# Altium PCB pcb.PcbDoc
Units mm, origin at the board's own origin, x right, y up, seen from the top; angles counter-clockwise.
Board outline 22.86 x 22.86 mm, 2 copper layers (Top Layer, Bottom Layer); 3 components, 11 nets, 22 pads, 0 vias.
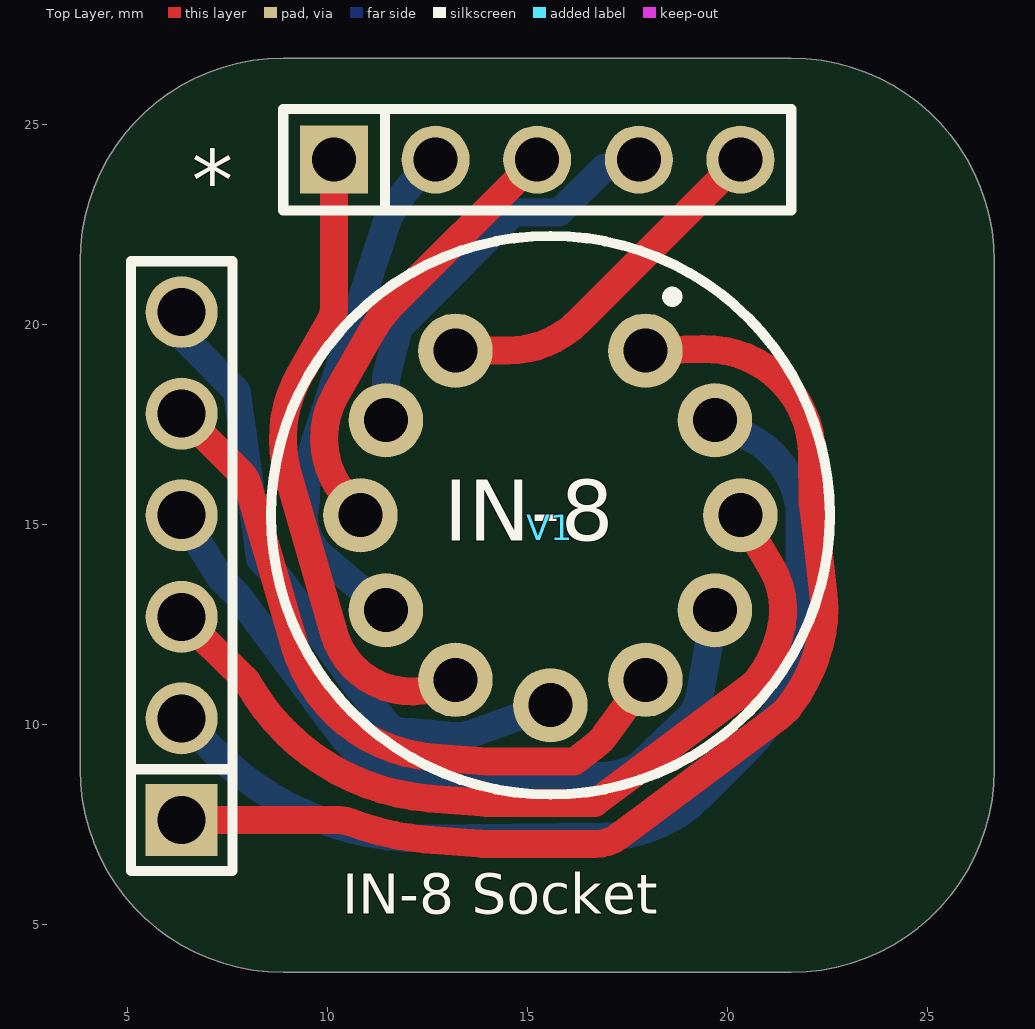
[diagram p0: Top Layer view]
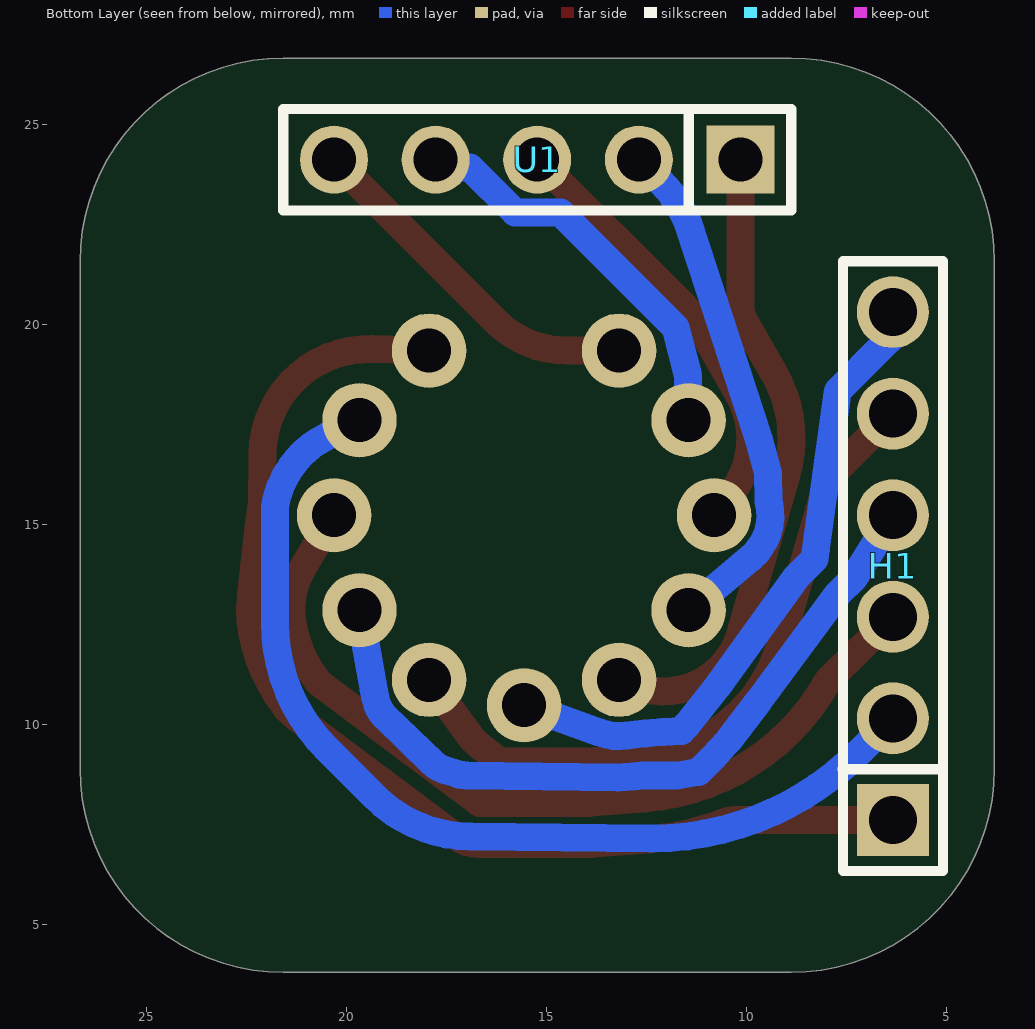
[diagram p1: Bottom Layer view, seen from below]

## Layer stack, top to bottom
Top Solder: solder mask 0.0102, Solder Resist, Dk 3.5
Top Layer: signal copper 0.0356
Dielectric 1: dielectric 0.32, FR-4, Dk 4.8
Bottom Layer: signal copper 0.0356
Bottom Solder: solder mask 0.0102, Solder Resist, Dk 3.5

## Board outline
3.81,8.89 3.81,21.59 cw(c8.89,21.59) 8.89,26.67 21.59,26.67 cw(c21.59,21.59) 26.67,21.59 26.67,8.89 cw(c21.59,8.89) 21.59,3.81 8.89,3.81 cw(c8.89,8.89)

## Design rules (kind name [scope] priority, off if disabled: settings)
BoardOutlineClearance [All] p1: gap=0.2 ignorepadtopadclearanceinfootprint=FALSE
Clearance [All] p1: gap=0.127 ignorepadtopadclearanceinfootprint=FALSE except(0.25: Arc-Hole Track-Hole SMDPad-Hole THPad-Hole Via-Hole Fill-Hole Poly-Hole Region-Hole Text-Hole; 0.33: Arc-Arc Arc-Track Track-Track)
ComponentClearance [All] p1: gap=0.127 collisioncheckmode=3 verticalgap=0.127 showdistances=TRUE
DiffPairsRouting [All] p1: maxlimit=0.254 minlimit=0.127 mostfreqgap=0.127 toplayer_minwidth=0.127 toplayer_maxwidth=25.4 toplayer_prefwidth=0.127 bottomlayer_minwidth=0.127 bottomlayer_maxwidth=25.4 bottomlayer_prefwidth=0.127 maxuncoupledlength=12.7
Height [All] p1: minheight=0 maxheight=1816.048 prefheight=12.7
HoleSize [All] p1: absolutevalues=TRUE maxlimit=6.3 minlimit=0.3 maxpercent=80.000 minpercent=20.000
HoleToHoleClearance [All] p1: gap=0.25 allowstackedmicrovias=FALSE
MinimumAnnularRing [All] p1: minimumring=0.076
MinimumSolderMaskSliver [All] p1: minsoldermaskwidth=0
PlaneClearance [All] p1: clearance=0.127
PlaneConnect PlaneConnectPowerPads [InPadClass('PowerPads')] p1: planeconnectstyle=Direct reliefexpansion=0.508 reliefentries=4 reliefconductorwidth=0.254 reliefairgap=0.254
PlaneConnect [All] p2: pad.planeconnectstyle=Relief pad.reliefexpansion=0.3 pad.reliefentries=4 pad.reliefconductorwidth=0.127 pad.reliefairgap=0.127 via.planeconnectstyle=Direct via.reliefexpansion=0.3 via.reliefentries=4 via.reliefconductorwidth=0.127 via.reliefairgap=0.127
PolygonConnect PolygonConnectPowerPads [All vs (InPadClass('PowerPads'))] p1: connectstyle=Direct reliefconductorwidth=0.254 reliefentries=4 polygonreliefangle="90 Angle" airgapwidth=0.254
PolygonConnect [All] p2: thpad.connectstyle=Relief thpad.reliefconductorwidth=0.127 thpad.reliefentries=4 thpad.polygonreliefangle="90 Angle" thpad.airgapwidth=0.127 smdpad.connectstyle=Relief smdpad.reliefconductorwidth=0.127 smdpad.reliefentries=4 smdpad.polygonreliefangle="90 Angle" smdpad.airgapwidth=0.127 via.connectstyle=Direct via.reliefconductorwidth=0.127 via.reliefentries=4 via.polygonreliefangle="90 Angle" via.airgapwidth=0.127
RoutingVias [All] p1: holewidth=0.3 width=0.6 viastyle="Through Hole" minholewidth=0.3 minwidth=0.6 maxholewidth=0.6 maxwidth=6.6
SilkToSilkClearance [All] p1: silktosilkclearance=0
SilkToSolderMaskClearance [IsPad] p1: minsilkscreentomaskgap=0.127 clearancetoexposedcopper=TRUE
SolderMaskExpansion [All] p1: expansion=0.075 istentingtop=FALSE
Width [All] p1: maxlimit=25.4 minlimit=0.127 preferedwidth=0.7 minimp=50.000000 maximp=50.000000 favimp=50.000000
20 further rules are at their usual default settings.

## Components (designator, comment, footprint, x,y, rotation, side; value= is the part's Value field where it differs from the comment)
H1 "2.54-1x6P" 2.54-1x6P 6.35,13.97 r90 bottom
U1 "HX PZ2.54-1x5P ZZ" "HX PZ2.54-1x5P ZZ" 15.24,24.13 r0 bottom
V1 "Nixie_Tube_IN-8" Nixie_Tube_IN-8 15.57,15.24 r0 top

## Footprints (in the part's own frame and the unit in brackets; to place one, negate y for a bottom-side part, rotate by r counter-clockwise, add the part's x,y. Pads: shape width x height; smd on the part's side, far side on the other; paste and mask are expansions set on the pad)
2.54-1x6P [mm] "Pin Headers. -40C~+105C 1 1x6P 2.54mm 2.5mm 3A 3mm 6P 6mm Black Brass Gold Pin Header Through Hole ,P=2.54mm Pin Headers ROHS"
  rect 1.8x1.8 hole 1.2: 1(-6.35,0)
  round 1.8 hole 1.2: 2(-3.81,0) 3(-1.27,0) 4(1.27,0) 5(3.81,0) 6(6.35,0)
  silkscreen extent -7.62,-1.25 7.62,1.25, body extent -7.63,-1.27 7.62,1.27, height 8.5
"HX PZ2.54-1x5P ZZ" [mm] "Pin Headers. -40C~+105C 1 1kV 1x5P 2.54mm 2.5mm 3A 3mm 5P 6mm Black Brass Gold Pin Header Through Hole Plugin,P=2.54mm Pin Headers ROHS"
  rect 1.7x1.7 hole 1.1: 1(-5.08,0)
  round 1.7 hole 1.1: 2(-2.54,0) 3(0,0) 4(2.54,0) 5(5.08,0)
  silkscreen extent -6.35,-1.27 6.35,1.27, body extent -6.35,-1.27 6.36,1.27, height 8.54
Nixie_Tube_IN-8 [mm]
  round 1.862 hole 1.1: 1(2.375,4.114) 2(4.114,2.375) 3(4.75,0) 4(4.114,-2.375) 5(2.375,-4.114) 6(0,-4.75) 7(-2.375,-4.114) 8(-4.114,-2.375) 9(-4.75,0) 10(-4.114,2.375) 11(-2.375,4.114)
  silkscreen extent -6.98,-6.98 6.98,6.98

## Part data
H1: "Pin Headers. -40C~+105C 1 1x6P 2.54mm 2.5mm 3A 3mm 6P 6mm Black Brass Gold Pin Header Through Hole ,P=2.54mm Pin Headers ROHS", JLCPCB Part #=C37208, Manufacturer="BOOMELE(Boom Precision Elec)", Component Type=Standard, Design Item ID=2.54-1x6P, Manufacturer Part Number=2.54-1x6P
U1: "Pin Headers. -40C~+105C 1 1kV 1x5P 2.54mm 2.5mm 3A 3mm 5P 6mm Black Brass Gold Pin Header Through Hole Plugin,P=2.54mm Pin Headers ROHS", JLCPCB Part #=C32713271, Manufacturer=hanxia, Component Type="Integrated Circuits", Design Item ID="HX PZ2.54-1x5P ZZ", Manufacturer Part Number="HX PZ2.54-1x5P ZZ"

## Nets (pads, with @x,y where several pads share a name; then routed paths per layer and width w, separated by ;. In a path a pad name is that pad's centre, name@x,y a point inside that pad or via, vN(x,y) a via of type N, cw(c..) or ccw(c..) an arc to the next point about the centre after c; other vN are vias at no path point)
AN_COMMON: U1.5 V1.11 | length 9
  Top Layer w0.7: V1.11 14.492,19.354 ccw(c14.492,21.894) 16.288,20.098 U1.5
CATH_0: U1.4 V1.10 | length 10.1
  Bottom Layer w0.7: V1.10@11.465,17.648 11.465,18.709 11.787,19.937 12.198,20.348 cw(c13.195,19.354) 12.2,20.35 14.653,22.803 15.79,22.803 16.925,23.939 17.589,23.939 U1.4
CATH_1: H1.1 V1.1 | length 28.6
  Top Layer w0.7: H1.1 10.292,7.62 cw(c10.29,6.92) 10.542,7.573 ccw(c12.986,13.865) 12.451,7.136 13.791,7.029 ccw(c13.958,9.082) 13.958,7.022 16.685,7.022 ccw(c16.685,8.052) 17.302,7.227 21.244,10.177 ccw(c20.629,11.003) 21.246,10.178 21.286,10.208 ccw(c20.669,11.033) 21.398,10.305 21.467,10.374 ccw(c20.741,11.105) 21.561,10.482 ccw(c18.102,13.097) 22.366,12.305 ccw(c19.306,12.873) 22.398,13.223 22.21,14.914 22.126,15.54 22.112,16.759 ccw(c19.445,16.727) 19.369,19.394 V1.1
CATH_2: H1.2 V1.2 | length 25.4
  Bottom Layer w0.7: H1.2 7.213,9.297 ccw(c12.379,14.47) 12.374,7.16 12.379,7.16 16.906,7.21 16.924,7.21 ccw(c16.91,10.59) 19.3,8.2 20.491,9.391 ccw(c17.329,12.552) 21.8,12.552 21.8,15.384 ccw(c21.1,15.384) 21.788,15.513 ccw(c19.436,15.067) 20.496,17.214 V1.2
CATH_3: H1.3 V1.3 | length 21.7
  Top Layer w0.7: H1.3 7.917,11.154 cw(c7.426,10.656) 7.921,11.151 7.988,11.084 ccw(c12.986,13.865) 12.529,8.163 13.874,8.055 ccw(c13.958,9.082) 13.958,8.052 16.685,8.052 20.629,11.003 20.669,11.033 20.741,11.105 ccw(c18.102,13.097) 21.352,12.491 21.353,12.495 ccw(c19.306,12.873) 21.095,13.937 V1.3 V1.3@20.323,15.236
CATH_4: H1.4 V1.4 | length 19.2
  Bottom Layer w0.7: H1.4 7.322,13.675 7.727,13.27 9.693,10.613 10.454,9.614 10.714,9.328 10.893,9.135 10.908,9.12 11.205,8.824 11.76,8.73 12.61,8.73 cw(c12.607,7) 12.849,8.713 ccw(c13.195,11.126) 13.225,8.689 17.008,8.732 ccw(c17,9.432) 17.206,8.763 17.555,8.87 ccw(c16.797,11.33) 17.57,8.875 ccw(c17.36,9.543) 17.848,9.04 19.054,10.211 ccw(c18.566,10.713) 19.227,10.482 ccw(c16.797,11.33) 19.331,10.881 V1.4
CATH_5: H1.5 V1.5 | length 17.6
  Top Layer w0.7: H1.5 7.834,16.296 cw(c7.338,15.802) 8.01,15.997 9.169,11.999 ccw(c12.924,13.087) 12.63,9.189 13.668,9.11 13.8,9.1 13.958,9.082 16.153,9.082 ; 16.154,9.083 16.689,9.483 ccw(c16.025,10.371) 16.922,9.719 V1.5
CATH_6: H1.6 V1.6 | length 16.3
  Bottom Layer w0.7: H1.6 ccw(c11.5,20.32) 6.389,19.689 6.566,19.511 7.727,18.35 8.275,14.38 8.307,14.147 8.757,13.697 10.723,10.972 11.484,10.015 11.637,9.848 cw(c11.275,-2.415) 12.994,9.733 ccw(c13.195,11.126) 13.675,9.803 V1.6
CATH_7: U1.1 V1.7 | length 16.1
  Top Layer w0.7: U1.1 10.16,20.441 cw(c9.46,20.441) 10.068,20.094 9.312,18.776 ccw(c12.124,17.162) 9.009,16.261 10.157,12.288 ccw(c12.086,12.844) 12.832,10.981 V1.7
CATH_8: U1.2 V1.8 | length 12.9
  Bottom Layer w0.7: V1.8 9.914,14.162 cw(c10.82,15.24) 9.445,15.543 cw(c10.82,15.24) 9.46,15.604 9.472,16.285 9.699,17.13 9.705,17.148 11.484,22.586 11.59,22.792 cw(c14.56,21.27) 12.2,23.63 U1.2
CATH_9: U1.3 V1.9 | length 11.1
  Top Layer w0.7: V1.9 10.384,15.794 cw(c12.124,17.162) 10.205,18.263 11.157,19.922 cw(c13.36,18.658) 11.564,20.454 U1.3

## Silkscreen, mask and mechanical layers (free items; w line width, h text height)
Top Overlay:
  lines w0.254: 5.08,8.89 7.62,8.89 ; 11.43,22.86 11.43,25.4 ; 5.08,6.35 7.62,6.35 7.62,21.59 5.08,21.59 5.08,6.35 ; 8.89,22.86 21.59,22.86 21.59,25.4 8.89,25.4 8.89,22.86
  text "*" at 6.604,22.86 h1.52
  text "IN-8 Socket" at 10.36,5.28 h1
Mechanical 1:
  circle w0.254: c15.57,15.24 r9.907
Mechanical 13:
  the board outline again, w0.254

## Text inside footprints (layer, text, board x,y; h text height)
V1: Top Overlay "IN-8" at 12.903,14.605 h1.52